# EAGLE board STM32F103C8 v133 (EAGLE 9.7.0)
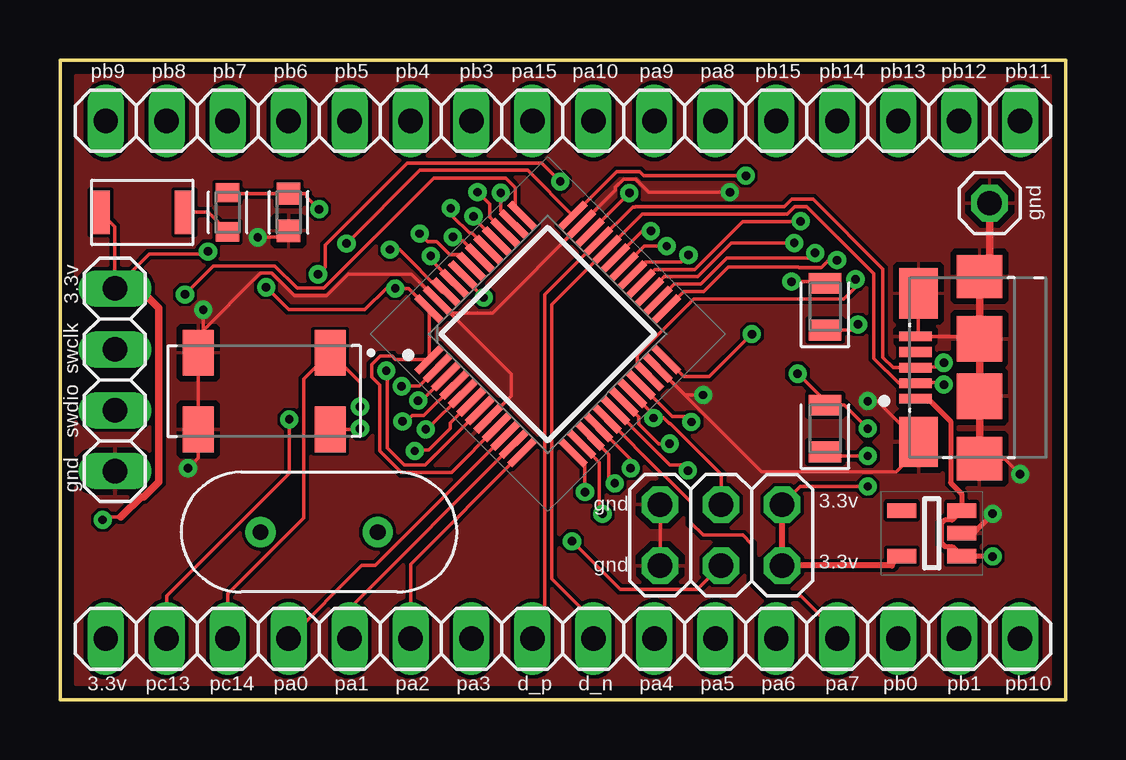
[diagram p0: board, top side]
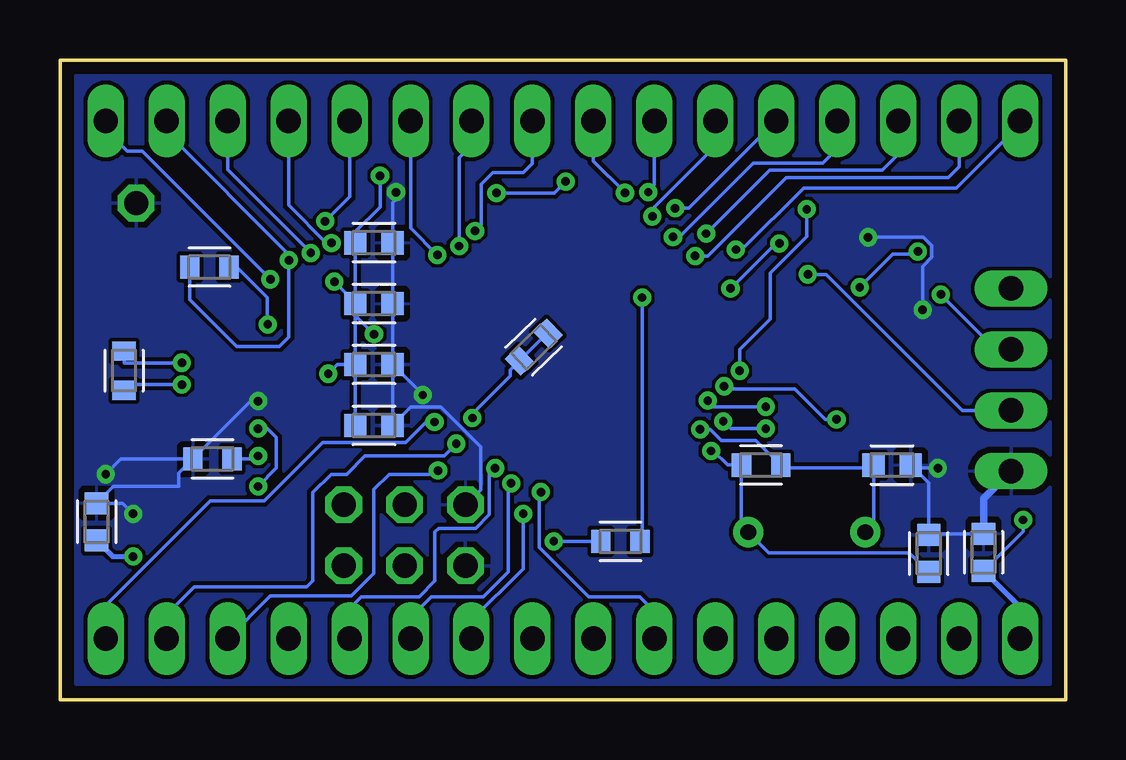
[diagram p1: board, bottom side, seen from below]

Size 41.91 x 26.67 mm. Coordinates in mm from the lower left corner, seen from the top.
Outline: 0,26.67 41.91,26.67 41.91,0 0,0 0,26.67
Copper layers (1*16): Top 0.035mm / dielectric 1.5mm / Bottom 0.035mm
Design rules "default *": minimum track width 6mil, minimum drill 0.35mm, track to track 6mil, track to pad 6mil, pad to pad 6mil, via to via 6mil, smd to smd 6mil, copper to edge 20mil, drill to drill 6mil, minimum pad ring 10mil, minimum via ring 8mil, stop-mask expansion 4mil, vias tented up to drill 0mil, thermal gap 10mil

## Footprints (pad centres in the part's own frame; a part is rotated, then mirrored left to right if it is on the bottom)
CAPC1608X85 = smd 0.921 x 0.97: 1 -0.775,0; 2 0.775,0
LEDC2012X105N_RND-R = smd 0.862 x 1.362: A 0.975,0; C -0.975,0
SOT95P280X145-5N = smd 1.2 x 0.6: 1 -1.25,0.95; 2 -1.25,0; 3 -1.25,-0.95; 4 1.25,-0.95; 5 1.25,0.95
QFP50P900X900X160-48N = smd 1.475 x 0.3: 1 -4.238,2.75; 2 -4.238,2.25; 3 -4.238,1.75; 4 -4.238,1.25; 5 -4.238,0.75; 6 -4.238,0.25; 7 -4.238,-0.25; 8 -4.238,-0.75; 9 -4.238,-1.25; 10 -4.238,-1.75; 11 -4.238,-2.25; 12 -4.238,-2.75; 25 4.238,-2.75; 26 4.238,-2.25; 27 4.238,-1.75; 28 4.238,-1.25; 29 4.238,-0.75; 30 4.238,-0.25; 31 4.238,0.25; 32 4.238,0.75; 33 4.238,1.25; 34 4.238,1.75; 35 4.238,2.25; 36 4.238,2.75 | smd 0.3 x 1.475: 13 -2.75,-4.238; 14 -2.25,-4.238; 15 -1.75,-4.238; 16 -1.25,-4.238; 17 -0.75,-4.238; 18 -0.25,-4.238; 19 0.25,-4.238; 20 0.75,-4.238; 21 1.25,-4.238; 22 1.75,-4.238; 23 2.25,-4.238; 24 2.75,-4.238; 37 2.75,4.238; 38 2.25,4.238; 39 1.75,4.238; 40 1.25,4.238; 41 0.75,4.238; 42 0.25,4.238; 43 -0.25,4.238; 44 -0.75,4.238; 45 -1.25,4.238; 46 -1.75,4.238; 47 -2.25,4.238; 48 -2.75,4.238
AMPHENOL_10118192-0001LF = smd 0.4 x 1.35: 1 -1.3,0; 2 -0.65,0; 3 0,0; 4 0.65,0; 5 1.3,0 | smd 2.1 x 1.6: SH1 -3.1,-0.125; SH2 3.1,-0.125 | smd 1.8 x 1.9: SH3 -3.8,-2.675; SH6 3.8,-2.675 | smd 1.9 x 1.9: SH4 -1.2,-2.675; SH5 1.2,-2.675
1X16 = drill 1.016 long: 1 -19.05,0; 2 -16.51,0; 3 -13.97,0; 4 -11.43,0; 5 -8.89,0; 6 -6.35,0; 7 -3.81,0; 8 -1.27,0; 9 1.27,0; 10 3.81,0; 11 6.35,0; 12 8.89,0; 13 11.43,0; 14 13.97,0; 15 16.51,0; 16 19.05,0
2X03 = drill 1.016 octagon: 1 -2.54,-1.27; 2 -2.54,1.27; 3 0,-1.27; 4 0,1.27; 5 2.54,-1.27; 6 2.54,1.27
1X04 = drill 1.016 long: 1 -3.81,0; 2 -1.27,0; 3 1.27,0; 4 3.81,0
1X01 = drill 1.016 octagon: 1 0,0
RESC1608X60 = smd 0.799 x 0.974: 1 -0.815,0; 2 0.815,0
B3U-1000P(M) = smd 0.8 x 1.8: 1 -1.75,0; 2 1.75,0
XTALRR488W45L1150T500H350B = drill 0.657 pad 1.257: 1 -2.44,0; 2 2.44,0
XTAL_ECS-.327-6-17X-TR = smd 1.3 x 1.9: 1 -2.75,-1.6; 2 2.75,-1.6; 3 2.75,1.6; 4 -2.75,1.6

## Placement (x,y rotation side)
C1  0.1uf  [CAPC1608X85]  9.52,20.32 270 top
C2  1uf  [CAPC1608X85]  40.39,7.41 90 bottom
C3  1uf  [CAPC1608X85]  3.43,6.14 90 bottom
C4  22of  [CAPC1608X85]  7.24,9.78 180 bottom
C5  22pf  [CAPC1608X85]  5.71,6.1 270 bottom
C17  0.1uf  [CAPC1608X85]  28.83,19.05 0 bottom
C18  0.1uf  [CAPC1608X85]  28.83,16.51 0 bottom
C19  0.1uf  [CAPC1608X85]  28.83,13.97 0 bottom
C20  0.1uf  [CAPC1608X85]  28.83,11.43 0 bottom
D1  CHIP-ROUND-R_0805  [LEDC2012X105N_RND-R]  31.88,11.3 90 top
D2  Green  [LEDC2012X105N_RND-R]  31.88,16.38 90 top
IC1  MIC5504-3.3YM5-TR  [SOT95P280X145-5N]  36.32,6.93 180 top
IC3  STM32F103C8T7  [QFP50P900X900X160-48N]  20.32,15.24 45 top
J2  10118192-0001LF  [AMPHENOL_10118192-0001LF]  35.64,13.84 90 top
JP1  PINHD-1X16  [1X16]  20.95,2.54 0 top
JP2  PINHD-2X3  [2X03]  27.55,6.86 180 top
JP3  PINHD-1X4  [1X04]  2.29,13.34 90 top
JP4  PINHD-1X16  [1X16]  20.95,24.13 180 top
JP5  PINHD-1X1  [1X01]  38.73,20.7 0 top
R1  10k  [RESC1608X60]  6.98,20.32 270 top
R2  10k  [RESC1608X60]  22.17,14.7 44 bottom
R3  10k  [RESC1608X60]  18.56,6.6 180 bottom
R4  1k  [RESC1608X60]  35.56,10.03 0 bottom
R5  1k  [RESC1608X60]  35.69,18.03 0 bottom
R6  10k  [RESC1608X60]  39.24,13.72 90 bottom
R7  10Mohm  [RESC1608X60]  12.7,9.78 0 bottom
S1  B3U-1000P(M)  [B3U-1000P(M)]  3.43,20.32 180 top
XTAL1  HC49  [XTALRR488W45L1150T500H350B]  10.8,6.99 180 top
Y1  ECS-.327-6-17X-TR  [XTAL_ECS-.327-6-17X-TR]  8.51,12.86 180 top

## Library data of the parts
C1-C5 C17-C20 = Capacitor; CATEGORY: Capacitor
D1 D2 = LED; CATEGORY: LED; COLOR: RED; DESCRIPTION: CHIP LED ROUND; SUB-CATEGORY: CHIP; TYPE: ROUND_TOP
IC1 = MIC5504-3.3YM5-TR; ARROW_PART_NUMBER: MIC5504-3.3YM5-TR; ARROW_PRICE-STOCK: https://www.arrow.com/en/products/mic5504-3.3ym5-tr/microchip-technology; DESCRIPTION: MICROCHIP - MIC5504-3.3YM5-TR - LDO VOLT REG, 0.3A, 3.3V, SOT-23-5; HEIGHT: 1.45mm; MANUFACTURER_NAME: Microchip; MANUFACTURER_PART_NUMBER: MIC5504-3.3YM5-TR; MOUSER_PART_NUMBER: 998-MIC5504-3.3YM5TR; MOUSER_PRICE-STOCK: https://www.mouser.co.uk/ProductDetail/Microchip-Technology-Micrel/MIC5504-33YM5-TR/?qs=U6T8BxXiZAUmVQ5Zs217qQ%3D%3D
IC3 = STM32F103C8T7; ARROW_PART_NUMBER: STM32F103C8T7; ARROW_PRICE-STOCK: https://www.arrow.com/en/products/stm32f103c8t7/stmicroelectronics; DESCRIPTION: STM32F103C8T7, 32 bit ARM Cortex M3 Microcontroller 72MHz 64 kB Flash, 20 kB RAM, USB CAN I2C 48-Pin LQFP; HEIGHT: 1.6mm; MANUFACTURER_NAME: STMicroelectronics; MANUFACTURER_PART_NUMBER: STM32F103C8T7; MOUSER_PART_NUMBER: 511-STM32F103C8T7; MOUSER_PRICE-STOCK: https://www.mouser.co.uk/ProductDetail/STMicroelectronics/STM32F103C8T7/?qs=ZGWq6n3A68KjK%2FbZ7Ii58w%3D%3D
J2 = USB-micro; MANUFACTURER: Amphenol; PARTREV: B; STANDARD: Manufacturer Recommendation
JP1-JP5 = Connector; CATEGORY: CONNECTOR; SUB-CATEGORY: PIN-HEADER
R1-R7 = Resistor; CATEGORY: Resistor; SUB-CATEGORY: Fixed
S1 = Switch; CATEGORY: SWITCH; DESCRIPTION: Ultra-small Surface-mounting Tactile Switches with High Contact Reliability; MANUFACTURER: OMRON; OPERATING_TEMPERATURE: -25°C to +70°C at 60%RH max; PART_STATUS: ACTIVE; ROHS_COMPLIANCE: RoHS Compliant; SERIES: B3U; TYPE: Tactile
XTAL1 = Frequency-Source; CATEGORY: Frequency-Source; SUB-CATEGORY: Crystal-2Pin
Y1 = ECS-.327-6-17X-TRT; MANUFACTURER: ECS Inc.; PARTREV: 2016; STANDARD: Manufacturer Recommendation

## Nets
3.3V: C3.1 C17.1 C18.1 C19.1 C20.1 D1.A D2.A IC1.5 IC3.1 IC3.9 IC3.24 IC3.36 IC3.48 JP1.1 JP2.1 JP2.2 JP3.4 S1.2
+5V: C2.1 IC1.1 IC1.3 J2.1
BOOT0: JP2.4 R3.2
BOOT1: IC3.20 JP2.3 R2.1 R2.2
GND: C1.2 C2.2 C3.2 C4.1 C5.1 C17.2 C18.2 C19.2 C20.2 IC1.2 IC3.8 IC3.23 IC3.35 IC3.47 J2.5 J2.SH1 J2.SH2 J2.SH3 J2.SH4 J2.SH5 J2.SH6 JP2.5 JP2.6 JP3.1 JP5.1 R4.1 Y1.2 Y1.3
N$1: D1.C R4.2
N$2: R1.2 S1.1
N$3: D2.C R5.2
N$10: IC3.44 R3.1
NRST: C1.1 IC3.7 R1.1
PA0: IC3.10 JP1.4
PA1: IC3.11 JP1.5
PA2: IC3.12 JP1.6
PA3: IC3.13 JP1.7
PA4: IC3.14 JP1.10
PA5: IC3.15 JP1.11
PA6: IC3.16 JP1.12
PA7: IC3.17 JP1.13
PA8: IC3.29 JP4.6
PA9: IC3.30 JP4.7
PA10: IC3.31 JP4.8
PA15: IC3.38 JP4.9
PB0: IC3.18 JP1.14
PB1: IC3.19 JP1.15
PB3: IC3.39 JP4.10
PB4: IC3.40 JP4.11
PB5: IC3.41 JP4.12
PB6: IC3.42 JP4.13
PB7: IC3.43 JP4.14
PB8: IC3.45 JP4.15
PB9: IC3.46 JP4.16
PB10: IC3.21 JP1.16
PB11: IC3.22 JP4.1
PB12: IC3.25 JP4.2 R5.1
PB13: IC3.26 JP4.3
PB14: IC3.27 JP4.4
PB15: IC3.28 JP4.5
PC13: IC3.2 JP1.2
PC14: IC3.3 JP1.3 Y1.1
PC15: IC3.4 Y1.4
PD0: C4.2 IC3.5 R7.2 XTAL1.2
PD1: C5.2 IC3.6 R7.1 XTAL1.1
SWCLK: IC3.37 JP3.3
SWDIO: IC3.34 JP3.2
USB_N: IC3.32 J2.2 JP1.9 R6.1
USB_P: IC3.33 J2.3 JP1.8 R6.2

## Tracks (layer width: path | path; a pad name or v marks a point on that pad's centre or on a via)
3.3V  (via drill 0.35)
  Top 0.152: IC1.5 34.68,5.59 | v30.73,13.59 31.88,12.45 D1.A 32.68,12.28 v33.66,11.3 | IC3.24 25.99,13.46 27.05,13.46 v28.83,15.24 | D2.A 31.81,17.43 v30.48,17.43 | v28.58,21.84 24.32,21.84 24.15,22.01 23.2,22.01 IC3.36 19.48,22.07 14.99,22.07 v11.94,19.02 | JP2.1 30.85,8.89 v33.66,8.89 | S1.2 2.29,19.71 JP3.4 3.72,18.58 6.06,18.58 v6.17,18.69 | IC3.9 16.32,9.47 14.23,9.47 13.33,10.37 13.33,13.12 12.99,13.46 12.99,13.96 13.34,14.32 13.85,14.32 13.98,14.19 IC3.1 IC3.48 14.53,17.15 v13.97,17.15 13.59,17.15 12.7,16.26 9.52,16.26 v8.59,17.19 | v1.78,7.49 1.91,7.62 2.54,7.62
  Top 0.254: 34.68,5.59 JP2.2 JP2.1
  Top 0.305: JP3.4 3.3,17.15 4.12,16.33 4.12,9.08 3.49,8.46 3.38,8.46 2.54,7.62
  Bottom 0.152: C19.1 C18.1 | C18.1 C17.1 29.6,19.51 28.58,20.53 v28.58,21.84 | C19.1 C20.1 | C19.1 30.35,13.97 v30.73,13.59 | C18.1 29.6,16.02 v28.83,15.24 | C3.1 1.78,7.02 v1.78,7.49 | C18.1 29.6,16.55 v30.48,17.43 | v33.66,8.89 32.89,9.65 32.89,10.92 33.27,11.3 v33.66,11.3 | v13.97,17.15 12.1,19.02 v11.94,19.02 | v8.59,17.19 7.21,18.58 6.28,18.58 v6.17,18.69
  Bottom 0.203: 1.91,3.84 C3.1
  Bottom 0.305: JP1.1 1.91,3.84
+5V  (via drill 0.35)
  Top 0.203: J2.1 36.17,12.54 37.11,11.61 37.11,9.04 37.57,8.58 IC1.3 37.18,7.49 36.87,7.49 36.72,7.34 36.72,6.53 36.87,6.38 37.18,6.38 IC1.1 37.59,5.97 v38.86,5.97
  Bottom 0.203: C2.1 39.72,5.97 v38.86,5.97
BOOT0  (via drill 0.35)
  Top 0.152: JP2.4 26.56,4.6 23.34,4.6 v21.34,6.6
  Bottom 0.152: v21.34,6.6 v21.33,6.6 R3.2
BOOT1  (via drill 0.35)
  Top 0.152: 24.85,11.77 IC3.20 | 24.85,11.77 25.13,11.77 25.39,11.51 25.42,11.51 27.55,9.38 JP2.3 | 24.85,11.77 24.82,11.74 v24.73,11.74
  Bottom 0.152: R2.2 21.63,15.27 R2.1 23.15,13.75 23.15,13.49 24.73,11.91 v24.73,11.74
GND  (via drill 0.35)
  Top 0.152: J2.SH5 38.22,15.14 J2.5 35.77,15.27 J2.SH2 | 16.25,16.13 IC3.47 14.63,17.75 12.02,17.75 11.11,16.85 9.76,16.85 8.83,17.77 8.35,17.77 5.76,15.19 Y1.2 5.76,14.35 | 16.25,16.13 18.8,13.58 18.8,12.66 IC3.8 | 38.05,6.93 IC1.2 | JP2.6 JP2.5 | 5.76,14.35 Y1.3 5.76,10.08 v5.33,9.65 | v5.97,16.26 5.97,14.56 5.76,14.35 | v26.8,12.7 26.04,12.7 IC3.23 29.24,9.5 34.85,9.5 35.89,10.54 35.89,10.74 J2.SH1 34.06,12.45 v33.66,12.45 | 16.25,16.13 18.02,16.13 IC3.35 23.14,21.24 23.14,21.36 23.48,21.71 23.99,21.71 24.54,21.16 v27.91,21.16 | C1.2 9.26,19.28 v8.24,19.28 | 38.24,17.64 J2.SH6 | v40.01,9.4 39.36,10.04 J2.SH3
  Top 0.203: v38.86,7.75 38.05,6.93
  Top 0.305: J2.SH3 J2.SH4 J2.SH5 J2.SH6 38.73,18.06 JP5.1
  Bottom 0.152: C3.2 5.67,6.92 C5.1 5.71,9.03 C4.1 6.34,9.65 v5.33,9.65 | C19.2 C18.2 C17.2 28.05,20.71 27.91,20.86 v27.91,21.16 | v38.86,7.75 39.3,8.19 C2.2 39.68,8.89 36.96,8.89 36.96,9.45 R4.1 | C19.2 26.8,12.71 v26.8,12.7 | C20.2 28,11.49 | 28,11.49 27.29,12.19 26.04,12.19 24.38,10.54 24.38,8.75 JP2.5 | R4.1 33.96,12.45 v33.66,12.45 | R4.1 39.37,10.03 v40.01,9.4 | C19.2 28.05,11.54 28,11.49 | v5.97,16.26 5.97,18.06 5.59,18.45 5.59,18.93 5.94,19.28 v8.24,19.28
  Bottom 0.305: C3.2 3.43,8.38 JP3.1
  pour Top: 41.91,26.67 41.91,0 0,0 0,26.67
  pour Bottom: 0,26.67 41.91,26.67 41.91,0 0,0
N$1  (via drill 0.35)
  Top 0.152: v33.66,10.16 32.05,10.16 D1.C
  Bottom 0.152: R4.2 33.78,10.03 v33.66,10.16
N$2
  Top 0.152: S1.1 6.17,20.32 R1.2
N$3  (via drill 0.35)
  Top 0.152: v33.25,15.64 33.02,15.41 D2.C
  Bottom 0.152: R5.2 34.74,18.16 34.67,18.16 33.27,16.76 33.27,15.66 v33.25,15.64
N$10  (via drill 0.35)
  Top 0.152: v17.65,16.76 16.79,17.62 IC3.44
  Bottom 0.152: v17.65,16.76 17.65,6.69 R3.1
NRST  (via drill 0.35)
  Top 0.152: R1.1 7.03,21.1 C1.1 10.29,21.1 10.29,20.96 v10.8,20.45 | IC3.7 15.21,9.78 14.35,9.78 13.63,10.5 13.63,13.68 v13.59,13.71
  Bottom 0.152: v10.8,20.45 10.8,19.3 12.32,17.78 12.32,15.88 13.59,14.6 v13.59,13.71
PA0
  Top 0.152: IC3.10 13.14,5.59 12.57,5.59 JP1.4
PA1
  Top 0.152: IC3.11 12.06,3.8 JP1.5
PA2
  Top 0.152: IC3.12 14.61,5.64 JP1.6
PA3  (via drill 0.35)
  Top 0.152: v21.87,8.66 21.87,9.8 IC3.13
  Bottom 0.152: JP1.7 17.15,3.69 17.75,4.29 19.88,4.29 21.94,6.35 21.94,8.59 v21.87,8.66
PA4  (via drill 0.35)
  Top 0.152: IC3.14 22.48,9.9 22.48,7.87 v22.61,7.75
  Bottom 0.152: v22.61,7.75 22.61,5.46 24.77,3.3 JP1.10
PA5  (via drill 0.35)
  Top 0.152: IC3.15 22.86,10.23 22.86,9.27 v23.11,9.02
  Bottom 0.152: v23.11,9.02 23.24,8.89 23.24,5.33 24.28,4.29 26.45,4.29 27.3,3.43 JP1.11
PA6  (via drill 0.35)
  Top 0.152: IC3.16 23.78,10.02 v23.78,9.65
  Bottom 0.152: JP1.12 29.84,3.81 29.37,4.29 26.95,4.29 26.29,4.95 26.29,6.99 26.14,7.14 24.6,7.14 24.02,7.72 24.02,9.41 v23.78,9.65
PA7
  Top 0.152: IC3.17 25.1,9.4 25.14,9.4 26.29,8.25 26.29,7.37 26.8,6.86 28.45,6.86 28.83,6.48 28.83,4.95 29.46,4.32 30.86,4.32 32.38,2.79 JP1.13
PA8  (via drill 0.35)
  Top 0.152: IC3.29 24.38,18.24 25.89,18.24 v26.19,18.54
  Bottom 0.152: JP4.6 27.3,19.66 v26.19,18.54
PA9  (via drill 0.35)
  Top 0.152: IC3.30 24.34,18.91 v25.28,18.91
  Bottom 0.152: v25.28,18.91 25.28,22.6 24.77,23.11 JP4.7
PA10  (via drill 0.35)
  Top 0.152: v24.62,19.54 24.26,19.54 IC3.31
  Bottom 0.152: v24.62,19.54 24.36,19.8 24.36,21.49 23.88,21.97 22.61,21.97 22.23,22.35 JP4.8
PA15  (via drill 0.35)
  Top 0.152: IC3.38 18.37,20.38 v18.37,21.13
  Bottom 0.152: JP4.9 19.69,22.45 v18.37,21.13
PB0  (via drill 0.35)
  Top 0.152: v26.16,9.55 25.94,9.78 25.4,9.78 23.82,11.37 23.82,11.39 IC3.18
  Bottom 0.152: JP1.14 33.15,4.32 29.77,4.32 28.83,5.26 28.83,8.76 28.19,9.4 26.54,9.4 26.39,9.55 v26.16,9.55
PB1  (via drill 0.35)
  Top 0.152: v25.4,10.67 24.94,10.67 24.12,11.49 24.12,11.79 IC3.19
  Bottom 0.152: v25.4,10.67 25.91,10.16 29.21,10.16 29.97,9.4 30.61,9.4 31.37,8.64 31.37,4.95 31.62,4.7 36.32,4.7 37.47,3.56 JP1.15
PB3  (via drill 0.35)
  Top 0.152: IC3.39 17.91,20.13 17.91,20.65 v17.4,21.16
  Bottom 0.152: JP4.10 17.15,21.46 17.4,21.21 v17.4,21.16
PB4  (via drill 0.35)
  Top 0.152: v17.23,20.15 17.23,20.1 IC3.40
  Bottom 0.152: v17.23,20.15 17.13,20.25 17.13,20.55 14.61,23.08 JP4.11
PB5  (via drill 0.35)
  Top 0.152: v16.28,20.49 16.35,20.42 16.35,20.17 17.08,19.44 17.18,19.44 IC3.41
  Bottom 0.152: JP4.12 15.71,20.49 v16.28,20.49
PB6  (via drill 0.35)
  Top 0.152: IC3.42 16.78,19.14 16.52,19.14 v16.37,19.29
  Bottom 0.152: v16.37,19.29 16.12,19.29 13.03,22.38 10.13,22.38 9.52,22.98 JP4.13
PB7  (via drill 0.35)
  Top 0.152: IC3.43 16.64,18.56 16.24,18.56 15.7,19.1 15.31,19.1 v14.99,19.43
  Bottom 0.152: JP4.14 6.98,22.73 7.64,22.07 12.34,22.07 v14.99,19.43
PB8  (via drill 0.35)
  Top 0.152: IC3.45 15.45,18.35 v15.45,18.5
  Bottom 0.152: v15.45,18.5 14.93,18.5 11.66,21.77 4.9,21.77 4.45,22.23 JP4.15
PB9  (via drill 0.35)
  Top 0.152: IC3.46 15.91,17 14.15,18.76 v13.75,18.76
  Bottom 0.152: v13.75,18.76 13.49,18.76 10.92,21.34 4.57,21.34 1.91,24 JP4.16
PB10  (via drill 0.35)
  Top 0.152: IC3.21 25.52,11.81 26.07,11.81 v26.31,11.58
  Bottom 0.152: v26.31,11.58 26.64,11.58 27.5,10.72 30.97,10.72 33.4,8.28 35.66,8.28 40.01,3.94 JP1.16
PB11  (via drill 0.35)
  Top 0.152: IC3.22 24.05,13.98 24.05,14.34 26.41,16.7 32.65,16.7 33.15,17.19 v33.15,17.53
  Bottom 0.152: JP4.1 40.01,23.75 39.12,22.86 38.48,22.86 v33.15,17.53
PB12  (via drill 0.35)
  Top 0.152: v32.37,18.32 32.03,18.32 31.73,18.02 30.78,18.02 30.77,18.03 27.83,18.03 26.82,17.02 25.99,17.02 IC3.25
  Bottom 0.152: JP4.2 37.47,23.65 32.37,18.56 v32.37,18.32 32.37,15.12 32.77,14.73 34.54,14.73 36.5,16.69 R5.1
PB13  (via drill 0.35)
  Top 0.152: v31.46,18.62 31.25,18.41 27.78,18.41 26.69,17.32 25.59,17.32 IC3.26
  Bottom 0.152: v31.46,18.62 31.46,18.64 34.92,22.1 JP4.3
PB14  (via drill 0.35)
  Top 0.152: IC3.27 25.18,17.63 26.57,17.63 27.98,19.04 v30.59,19.04
  Bottom 0.152: v30.59,19.04 30.81,19.04 32.38,20.62 JP4.4
PB15  (via drill 0.35)
  Top 0.152: v30.86,19.95 30.85,19.94 28.45,19.94 26.44,17.93 24.78,17.93 IC3.28
  Bottom 0.152: JP4.5 29.84,20.97 v30.86,19.95
PC13  (via drill 0.35)
  Top 0.152: IC3.2 14.98,13.08 14.48,13.08 14.47,13.07 v14.24,13.07 | JP1.2 4.45,4.32 9.55,9.43 v9.55,11.68
  Bottom 0.152: v9.55,11.68 10.03,11.68 11.3,12.95 14.12,12.95 v14.24,13.07
PC14  (via drill 0.35)
  Top 0.152: JP1.3 6.98,4.4 10.16,7.58 10.16,13.36 Y1.1 12.5,13.22 v12.5,12.21 | IC3.3 15,12.39 | 15,12.39 | 15,12.39 v14.92,12.47
  Bottom 0.152: v12.5,12.21 14.66,12.21 v14.92,12.47
PC15  (via drill 0.35)
  Top 0.152: Y1.4 12.5,11.26 v12.5,11.3 | IC3.4 15.16,11.85 14.68,11.85 14.43,11.6 v14.27,11.6
  Bottom 0.152: v12.5,11.3 13.97,11.3 v14.27,11.6
PD0  (via drill 0.35)
  Top 0.152: IC3.5 15.29,11.27 v15.24,11.27
  Bottom 0.152: C4.2 8.01,9.65 | 8.01,9.65 8.01,7.33 XTAL1.2 | 8.01,9.65 11.76,9.65 R7.2 12.92,10.81 14.37,10.81 14.83,11.27 v15.24,11.27
PD1  (via drill 0.35)
  Top 0.152: IC3.6 16.26,11.53 16.26,11.3 15.37,10.41 14.83,10.41 v14.78,10.37
  Bottom 0.152: C5.2 6.52,6.13 12.38,6.13 XTAL1.1 13.52,7.27 R7.1 14.1,9.78 14.68,10.37 v14.78,10.37
SWCLK  (via drill 0.35)
  Top 0.152: IC3.37 18.97,20.48 18.97,21.35 18.58,21.74 15.58,21.74 10.99,17.15 9.88,17.15 8.96,18.08 6.39,18.08 v5.21,16.89
  Bottom 0.152: v5.21,16.89 2.92,14.61 JP3.3
SWDIO  (via drill 0.35)
  Top 0.152: v10.75,17.73 11.05,18.03 11.05,18.95 14.47,22.38 20.07,22.38 v20.84,21.6 | v23.72,21.12 v23.72,21.11 IC3.34
  Bottom 0.152: JP3.2 4.32,12.07 9.98,17.73 v10.75,17.73 | v23.72,21.12 21.32,21.12 v20.84,21.6
USB_N  (via drill 0.35)
  Top 0.152: JP1.9 22.23,3.31 20.5,5.03 20.5,16.48 IC3.32 24.26,20.24 30.3,20.24 30.61,20.56 31.11,20.56 33.91,17.76 33.91,14.22 34.94,13.19 J2.2 35.59,13.19 35.56,13.23 36.74,13.23 v36.83,13.14
  Bottom 0.152: R6.1 39.24,13.14 v36.83,13.14
USB_P  (via drill 0.35)
  Top 0.152: JP1.8 19.69,3.43 20.19,3.94 20.19,16.88 IC3.33 23.86,20.54 23.96,20.54 23.97,20.55 30.17,20.55 30.48,20.86 31.38,20.86 34.29,17.95 34.29,14.27 34.72,13.84 J2.3 35.59,13.84 35.56,13.87 36.66,13.87 v36.83,14.04
  Bottom 0.152: R6.2 39.24,14.04 v36.83,14.04

## Text on the board
tNames: pb9 | pb8 | pb7 | pb6 | pb5 | pb4 | pb3 | pa15 | pa10 | pa9 | pa8 | pb15 | pb14 | pb13 | pb12 | pb11 | gnd | 3.3v | swclk | swdio | gnd | gnd | 3.3v | gnd | 3.3v | 3.3v | pc13 | pc14 | pa0 | pa1 | pa2 | pa3 | d_p | d_n | pa4 | pa5 | pa6 | pa7 | pb0 | pb1 | pb10